# Altium PCB PCB.PcbDoc
Units mm, origin at the board's own origin, x right, y up, seen from the top; angles counter-clockwise.
Board outline 45 x 45 mm, 2 copper layers (Top Layer, Bottom Layer); 38 components, 27 nets, 182 pads, 49 vias.
Unrouted connection lines stored in the file: 8.
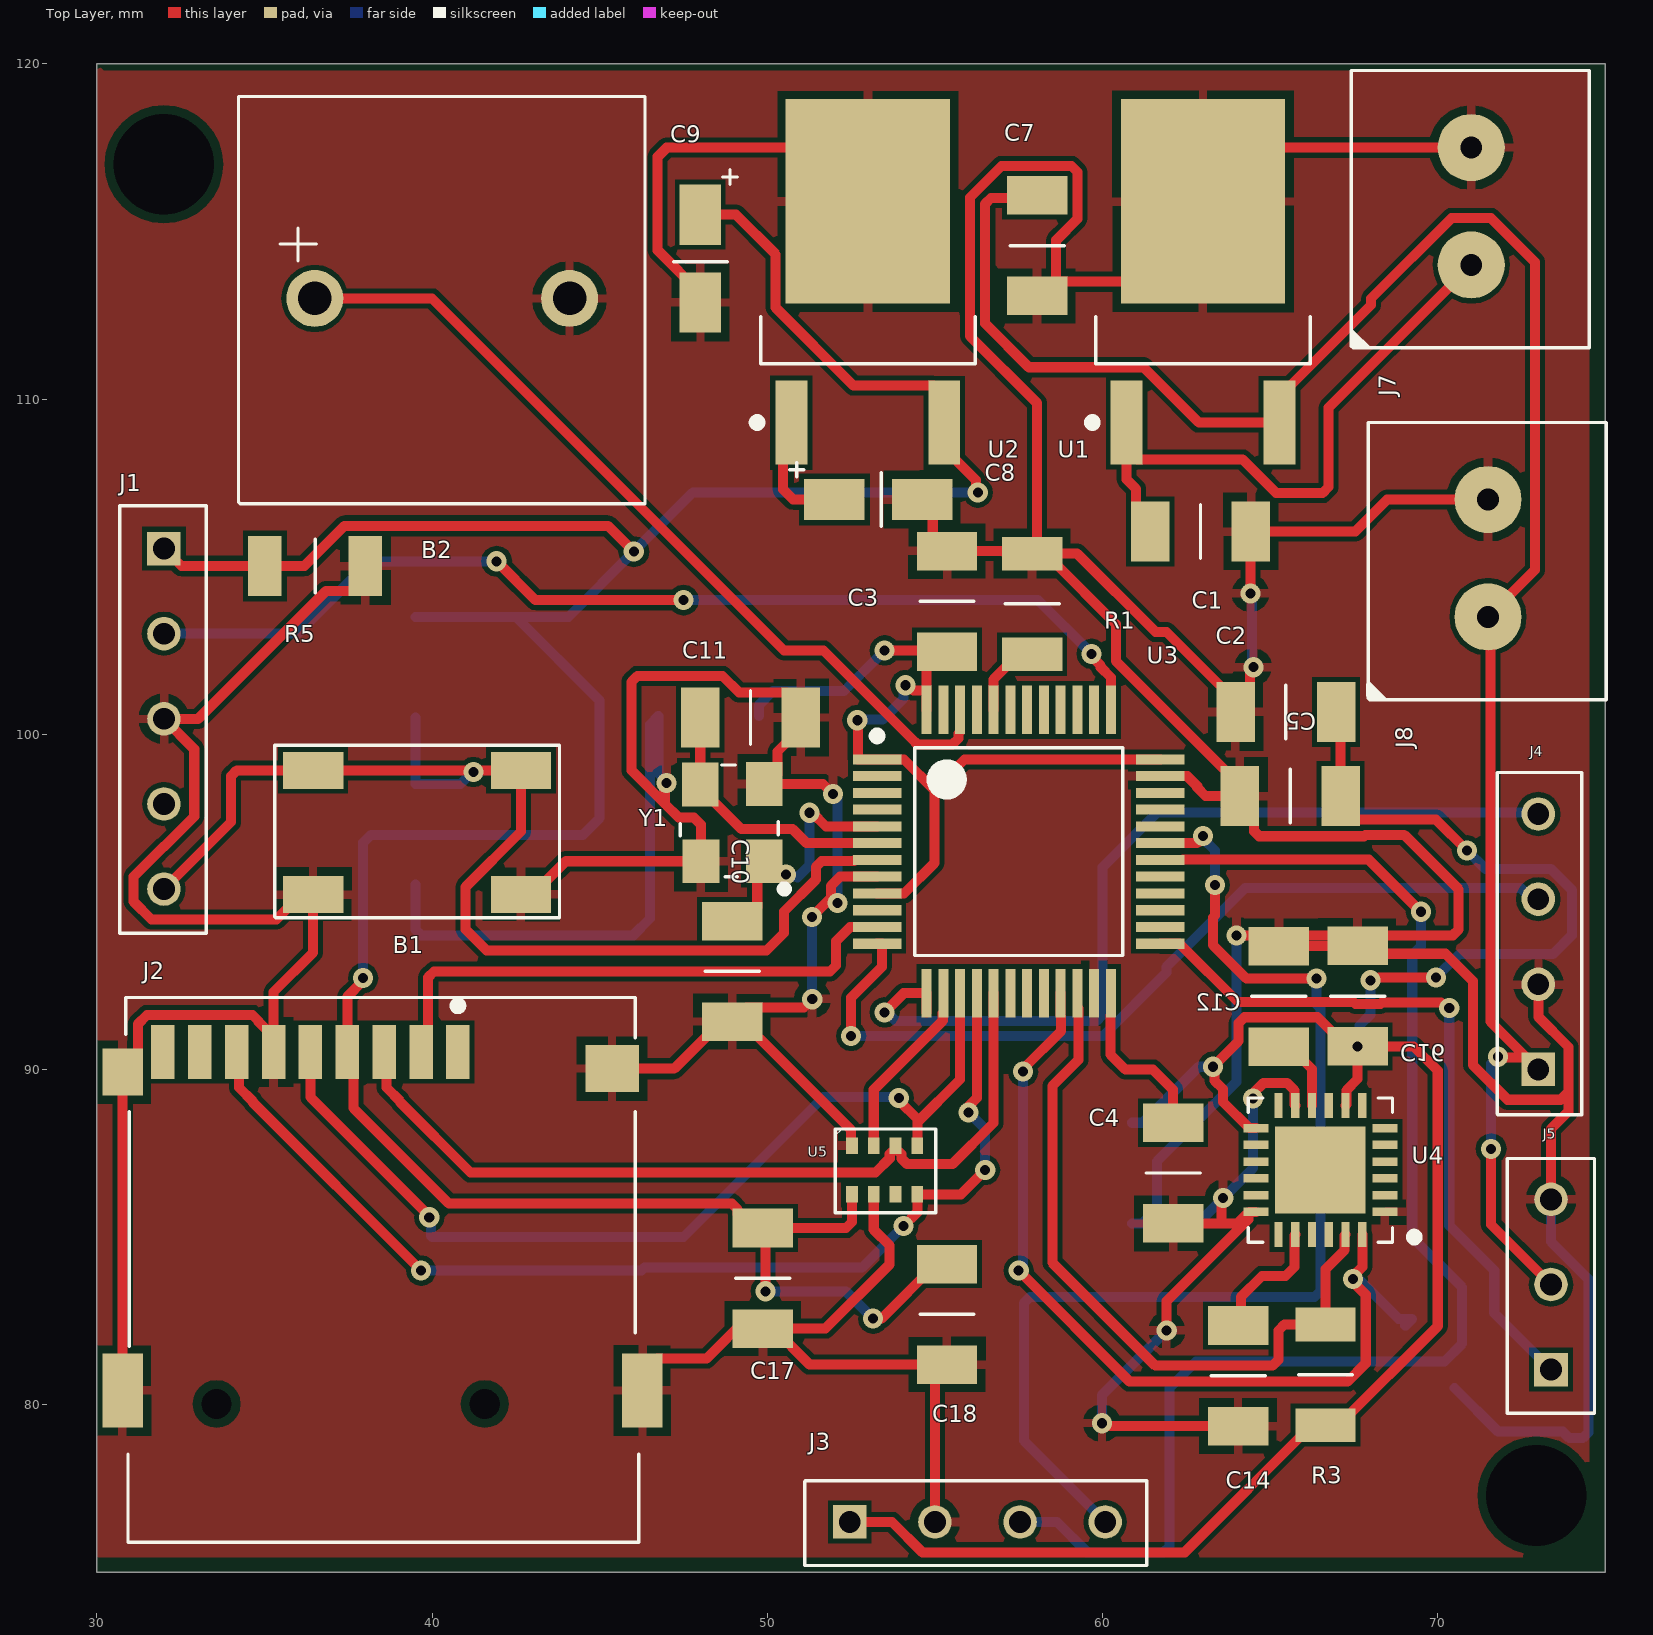
[diagram p0: Top Layer view]
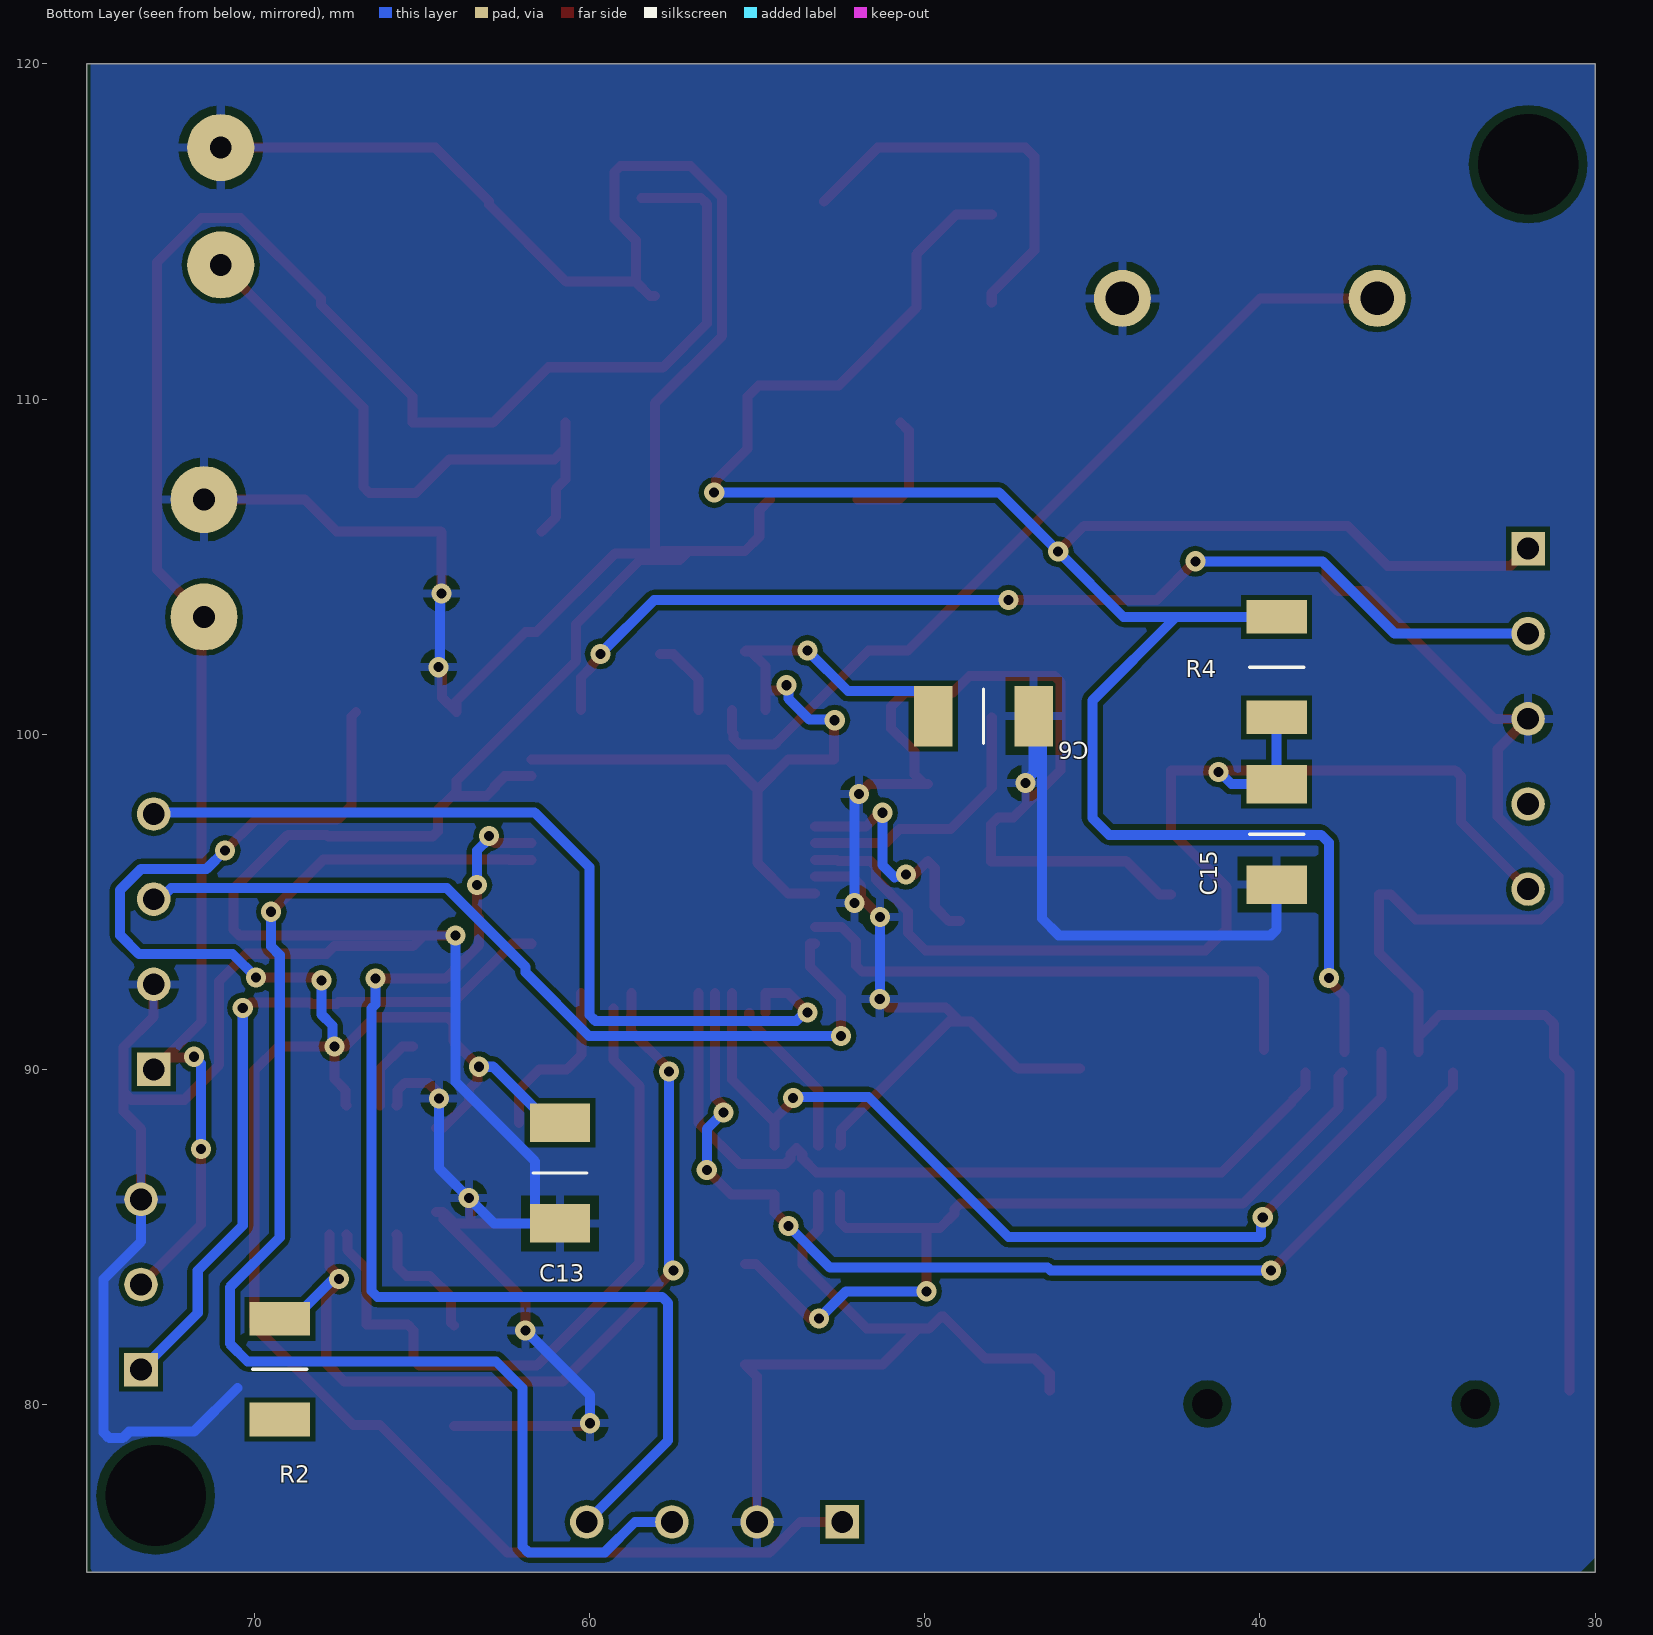
[diagram p1: Bottom Layer view, seen from below]
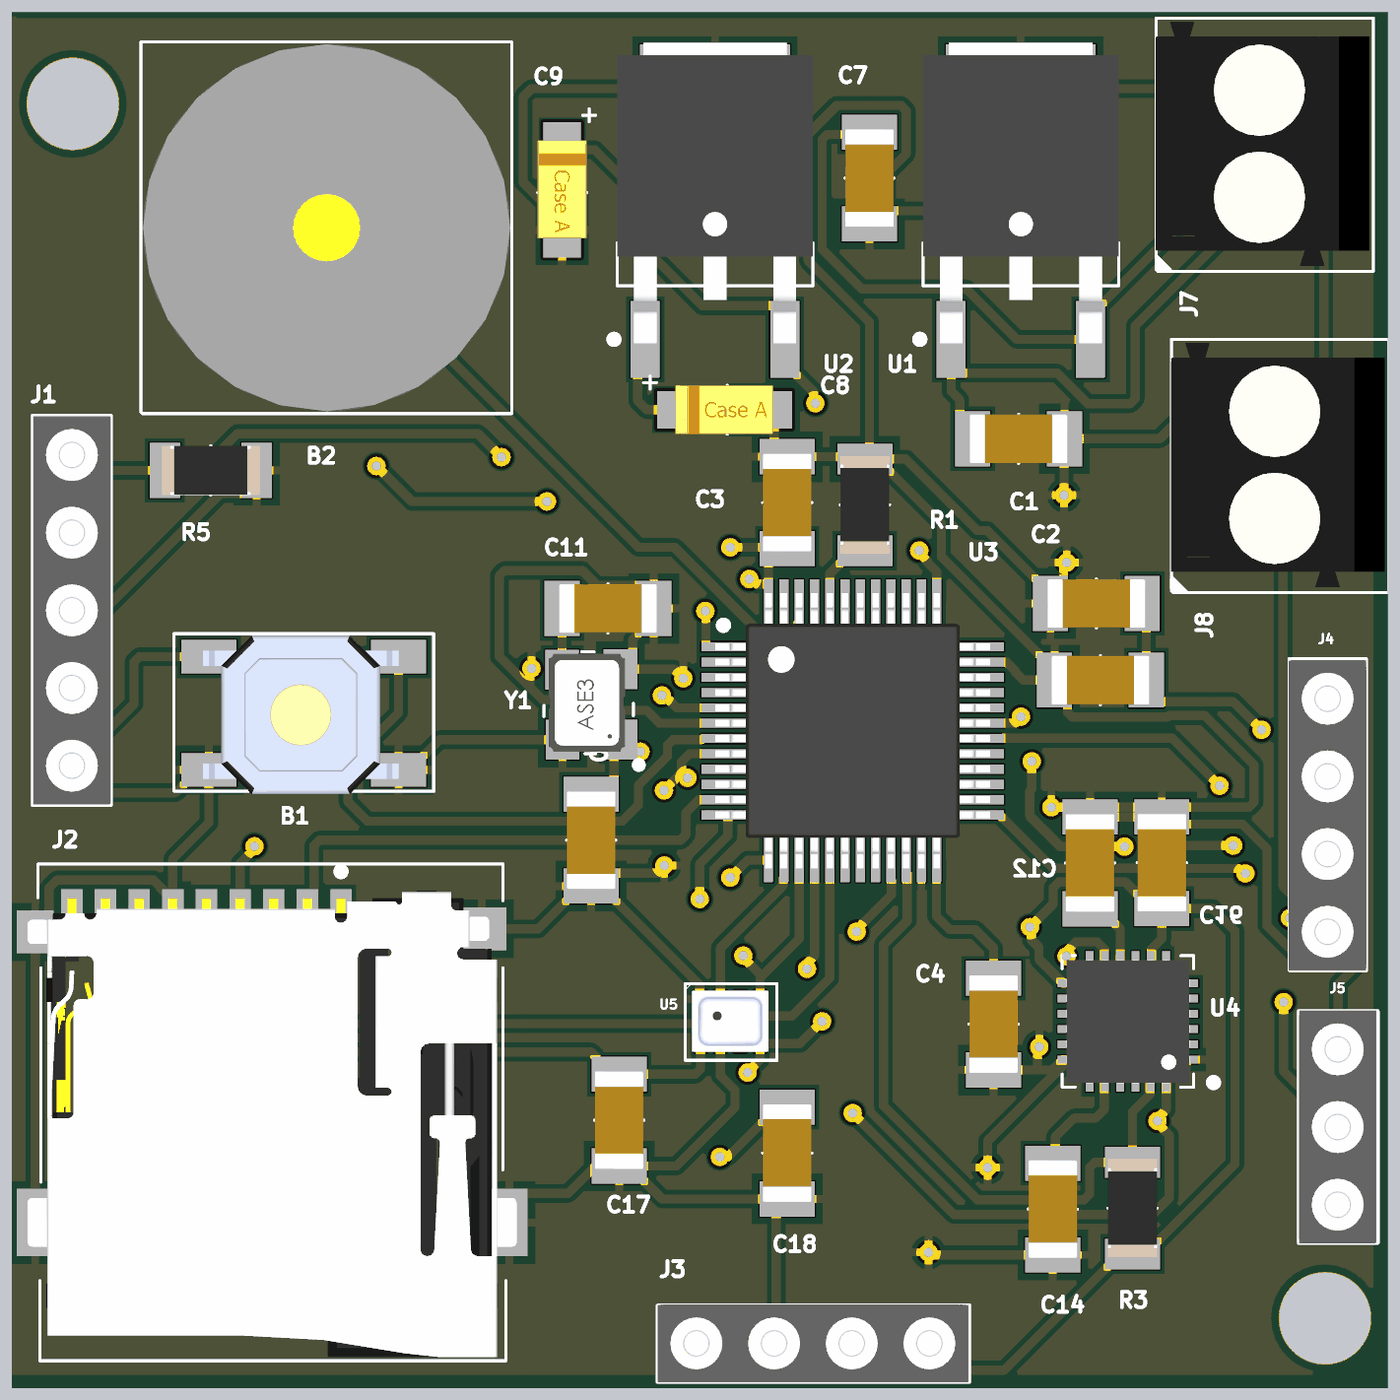
[diagram p2: 3D render of the assembled board from above, using the file's embedded part models]
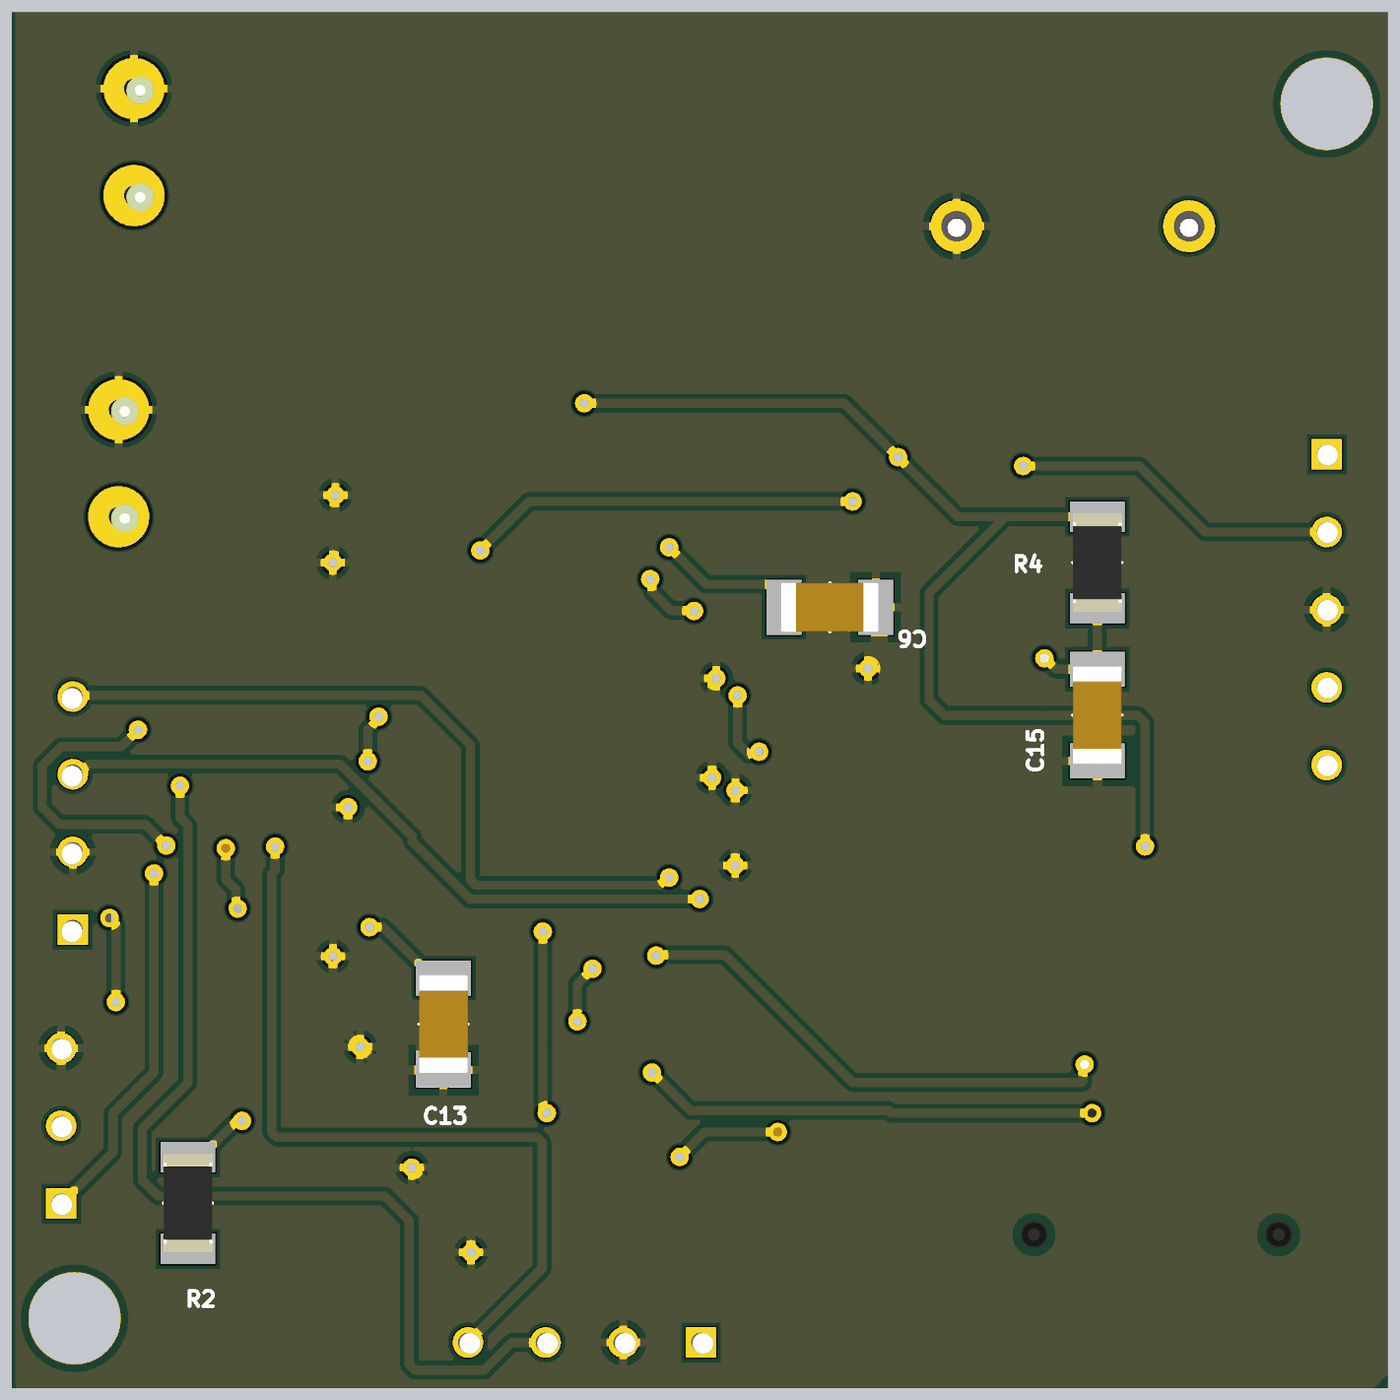
[diagram p3: 3D render of the assembled board from below, using the file's embedded part models]

## Layer stack, top to bottom
Top Solder: solder mask 0.0102, Solder Resist, Dk 3.5
Top Layer: signal copper 0.0356
Dielectric 1: dielectric 0.32, FR-4, Dk 4.8
Bottom Layer: signal copper 0.0356
Bottom Solder: solder mask 0.0102, Solder Resist, Dk 3.5

## Board outline
30,75 75,75 75,120 30,120

## Design rules (kind name [scope] priority, off if disabled: settings)
Clearance [All] p1: gap=0.254 ignorepadtopadclearanceinfootprint=FALSE except(0.152: Arc-Track Arc-SMDPad Arc-Poly Track-Track Track-SMDPad Track-Poly SMDPad-SMDPad SMDPad-Via SMDPad-Poly THPad-Poly Via-Poly Fill-Poly Poly-Poly)
PolygonConnect [All] p1: connectstyle=Relief reliefconductorwidth=0.254 reliefentries=4 polygonreliefangle="90 Angle" airgapwidth=0.254
RoutingVias [All] p1: holewidth=0.3 width=0.6 viastyle="Through Hole" minholewidth=0.2 minwidth=0.2 maxholewidth=0.9 maxwidth=1.27
SolderMaskExpansion [All] p1: expansion=0.102 istentingtop=FALSE
Width [All] p1: maxlimit=1 minlimit=0.254 preferedwidth=0.3 minimp=50.000000 maximp=50.000000 favimp=50.000000
30 further rules are at their usual default settings.

## Components (designator, comment, footprint, x,y, rotation, side; value= is the part's Value field where it differs from the comment)
B1 "Push Button" "PUSH BUTTON" 38.702,97.524 r0 top
B2 "BUZZER 5V" BUZZER 40.3,112.95 r0 top
C1 "330nF CAP-1206" CAP-1206 63,106 r0 top
C2 "0.1 uF CAP-1206" CAP-1206 65.394,100.714 r180 top
C3 "0.1 uF CAP-1206" CAP-1206 55.41,104.038 r90 top
C4 "0.1 uF CAP-1206" CAP-1206 62.056,86.836 r270 top
C5 "0.1 uF CAP-1206" CAP-1206 65.526,98.209 r180 top
C6 "0.1 uF CAP-1206" CAP-1206 48.172,100.491 r180 bottom
C7 "10 uF CAP-1206" CAP-1206 58,114.5 r270 top
C8 "10 uF - TANTAL" "CAP-1206 TANTAL" 53.4,107.3 r0 top
C9 "10 uF - TANTAL" "CAP-1206 TANTAL" 48.3,114.1 r270 top
C10 "16 pF CAP" "16pF CAP" 49,93 r90 top
C11 "16 pF CAP" "16pF CAP" 49.425,100.55 r180 top
C12 "0.1 uF CAP-1206" CAP-1206 67.66,92.262 r90 top
C13 "0.1 uF CAP-1206" CAP-1206 60.928,86.836 r270 bottom
C14 "2.2 nF c1206" CAP-1206 63.995,80.787 r270 top
C15 "0.1 uF CAP-1206" CAP-1206 39.45,97.09 r90 bottom
C16 "0.1 uF CAP-1206" CAP-1206 65.311,92.255 r90 top
C17 "0.1 uF CAP-1206" CAP-1206 49.815,83.695 r270 top
C18 "0.1 uF CAP-1206" CAP-1206 55.31,82.619 r270 top
J1 "HAEDER 2.54mm1*5" "FEMALE HEADER 1*5 2.54 MM" 32,105.54 r270 top
J2 "MİCRO SD KART" "MİCRO SD KART" 38.286,83.447 r0 top
J3 "HEADER 2.54mm 1*4" "FEMALE HEADER 1*4 2.54MM" 52.46,76.5 r0 top
J4 "HEADER 2.54mm 1*4" "FEMALE HEADER 1*4 2.54MM" 73,90 r90 top
J5 "HEADER 2.54mm 1*3" "FEMALE HEADER 1*3 2.54MM" 73.379,81.045 r90 top
J7 "KLEMENS" "KLEMENS 1*2 / 3.5mm" 71.4,115.8 r90 top
J8 "KLEMENS" "KLEMENS 1*2 / 3.5mm" 71.9,105.3 r90 top
R1 "10K R-1206" "RES 1206" 57.884,103.901 r90 top
R2 "4.7K R-1206" "RES 1206" 69.22,81.045 r270 bottom
R3 "4.7K R-1206" "RES 1206" 66.667,80.879 r270 top
R4 "10K R-1206" "RES 1206" 39.517,102.013 r90 bottom
R5 "10K R-1206" "RES 1206" 36.5,105 r180 top
U1 "L7805-DPAK" "DPAKL7805 REGULATOR" 63,113.5 r90 top
U2 "LD108633-DPAK" "DPAKL7805 REGULATOR" 53,113.5 r90 top
U3 "STM32101" FQP48 57.5,96.5 r0 top
U4 "MPU6050" MPU6050-QFN 66.5,87 r180 top
U5 "BMP280" BMP-280 53.5,87 r0 top
Y1 "8 Mhz 12.5pF Osc" "8 Mhz 12.5pF OSC" 49.017,97.597 r90 top

## Footprints (in the part's own frame and the unit in brackets; to place one, negate y for a bottom-side part, rotate by r counter-clockwise, add the part's x,y. Pads: shape width x height; smd on the part's side, far side on the other; paste and mask are expansions set on the pad)
"8 Mhz 12.5pF OSC" [mm]
  rect 1.3x1.1 smd mask+0.05: 1(-1.381,-0.89) 2(0.919,-0.89) 3(0.903,1.017) 4(-1.386,1.001)
  silkscreen extent -2.31,-1.59 1.48,1.61, body extent -1.78,-1.04 1.42,1.46, height 1.22
"16pF CAP" [mm]
  rect 1.15x1.8 smd mask+0.05: 1(-1.575,0.05) 2(1.425,0.05)
  silkscreen extent -0.07,-0.75 -0.07,0.86, body extent -1.67,-0.75 1.53,0.85, height 1
BMP-280 [mm]
  rect 0.35x0.5 smd: 1(-0.975,0.725) 2(-0.325,0.725) 3(0.325,0.725) 4(0.975,0.725) 5(0.975,-0.725) 6(0.325,-0.725) 7(-0.325,-0.725) 8(-0.975,-0.725)
  silkscreen extent -1.5,-1.28 1.53,1.25, body extent -1.5,-1 1.25,1.5, height 1.05
BUZZER [mm] "1*2"
  round 1.7 hole 1 mask+0.05: 1(-3.8,0.05) 2(3.8,0.05)
  silkscreen extent -6.08,-6.08 6.05,6.07, body extent -6,-6 6,6, height 9.5
CAP-1206 [mm]
  rect 1.15x1.8 smd mask+0.05: 1(-1.575,0.05) 2(1.425,0.05)
  silkscreen extent -0.07,-0.75 -0.07,0.86, body extent -1.67,-0.75 1.53,0.85, height 1
"CAP-1206 TANTAL" [mm]
  rect 1.8x1.23 smd: 1(-1.4,-0.3) 1(-1.4,-0.3) 2(1.22,-0.3)
  silkscreen extent -2.74,-1.1 0,0.8, body extent -1.7,-1.1 1.5,0.5, height 1.62
"DPAKL7805 REGULATOR" [mm]
  rect 2.5x0.95 smd mask+0.05: 1(-4.2,2.28) 2(-4.2,-2.28)
  rect 6.1x4.9 smd mask+0.05: 3(2.4,0)
  silkscreen extent -4.32,-3.2 -1.05,3.43, body extent -4.32,-3.2 5.5,3.2, height 3.3
"FEMALE HEADER 1*3 2.54MM" [mm]
  rect 1x1 hole 0.65 unplated mask+0.05: 1(0,0)
  round 1 hole 0.65 unplated mask+0.05: 2(2.54,0) 3(5.08,0)
  silkscreen extent -1.3,-1.3 6.3,1.3, body extent -1.31,-1.25 6.31,1.29, height 6.72
"FEMALE HEADER 1*4 2.54MM" [mm]
  rect 1x1 hole 0.65 unplated mask+0.05: 1(0,0)
  round 1 hole 0.65 unplated mask+0.05: 2(2.54,0) 3(5.08,0) 4(7.62,0)
  silkscreen extent -1.35,-1.3 8.86,1.23, body extent -1.34,-1.3 8.82,1.24, height 6.72
"FEMALE HEADER 1*5 2.54 MM" [mm]
  rect 1x1 hole 0.65 unplated mask+0.05: 1(0,0)
  round 1 hole 0.65 unplated mask+0.05: 2(2.54,0) 3(5.08,0) 4(7.62,0) 5(10.16,0)
  silkscreen extent -1.28,-1.32 11.47,1.26, body extent -1.25,-1.3 11.45,1.24, height 6.72
FQP48 [mm]
  rect 1.45x0.3 smd mask+0.05: 1(-4.225,2.75) 2(-4.225,2.25) 3(-4.225,1.75) 4(-4.225,1.25) 5(-4.225,0.75) 6(-4.225,0.25) 7(-4.225,-0.25) 8(-4.225,-0.75) 9(-4.225,-1.25) 10(-4.225,-1.75) 11(-4.225,-2.25) 12(-4.225,-2.75) 25(4.225,-2.75) 26(4.225,-2.25) 27(4.225,-1.75) 28(4.225,-1.25) 29(4.225,-0.75) 30(4.225,-0.25) 31(4.225,0.25) 32(4.225,0.75) 33(4.225,1.25) 34(4.225,1.75) 35(4.225,2.25) 36(4.225,2.75)
  rect 0.3x1.45 smd mask+0.05: 13(-2.75,-4.225) 14(-2.25,-4.225) 15(-1.75,-4.225) 16(-1.25,-4.225) 17(-0.75,-4.225) 18(-0.25,-4.225) 19(0.25,-4.225) 20(0.75,-4.225) 21(1.25,-4.225) 22(1.75,-4.225) 23(2.25,-4.225) 24(2.75,-4.225) 37(2.75,4.225) 38(2.25,4.225) 39(1.75,4.225) 40(1.25,4.225) 41(0.75,4.225) 42(0.25,4.225) 43(-0.25,4.225) 44(-0.75,4.225) 45(-1.25,4.225) 46(-1.75,4.225) 47(-2.25,4.225) 48(-2.75,4.225)
  silkscreen extent -4.35,-3.1 3.1,3.57, body extent -4.5,-4.5 4.5,4.5, height 1.6
"KLEMENS 1*2 / 3.5mm" [mm]
  round 2 hole 0.65: 1(-1.8,0.4) 2(1.7,0.4)
  silkscreen extent -4.31,-3.13 4,4.03, body extent -4.1,-3 3.89,4, height 8.9
"MİCRO SD KART" [mm] "SD CARD HOLDER"
  rect 0.7x1.6 smd paste+0 mask+0: 1(2.484,7.075) 2(1.384,7.075) 3(0.284,7.075) 4(-0.816,7.075) 5(-1.916,7.075) 6(-3.016,7.075) 7(-4.116,7.075) 8(-5.216,7.075) Cd(-6.316,7.075)
  rect 1.2x1.4 smd paste+0 mask+0: 10(-7.516,6.475)
  rect 1.6x1.4 smd paste+0 mask+0: 11(7.084,6.575)
  rect 1.2x2.2 smd paste+0 mask+0: 12(-7.516,-3.025) 13(7.984,-3.025)
  round 0 hole 0.9 unplated paste-1000 mask+0: ""(-4.716,-3.425) ""(3.284,-3.425)
  silkscreen extent -7.42,-7.55 7.88,8.7, body extent -7.77,-7.42 8.23,7.83, height 1.85
MPU6050-QFN [mm] "QFN, 24-Leads, Body 3,95x3,95mm, Pitch 0,50mm, Thermal Pad 2,70x2,60mm, IPC Medium Density"
  rect 0.75x0.25 smd mask+0.05: 1(-1.925,1.25) 2(-1.925,0.75) 3(-1.925,0.25) 4(-1.925,-0.25) 5(-1.925,-0.75) 6(-1.925,-1.25) 13(1.925,-1.25) 14(1.925,-0.75) 15(1.925,-0.25) 16(1.925,0.25) 17(1.925,0.75) 18(1.925,1.25)
  rect 0.25x0.75 smd mask+0.05: 7(-1.25,-1.925) 8(-0.75,-1.925) 9(-0.25,-1.925) 10(0.25,-1.925) 11(0.75,-1.925) 12(1.25,-1.925) 19(1.25,1.925) 20(0.75,1.925) 21(0.25,1.925) 22(-0.25,1.925) 23(-0.75,1.925) 24(-1.25,1.925)
  rect 2.7x2.6 smd: 25(0,0)
  silkscreen extent -2.93,-2.15 2.15,2.15, body extent -2.02,-2.02 2.02,2.02, height 0.95
"PUSH BUTTON" [mm] "HAZIR"
  rect 1.8x1.1 smd mask+0.05: 1(-2.25,1.4) 2(3.95,1.4) 3(-2.25,-2.3) 4(3.95,-2.3)
  silkscreen extent -3.4,-3 5.1,2.15, body extent -2.45,-3.1 3.95,2.1, height 1.5
"RES 1206" [mm]
  rect 1x1.8 smd mask+0.05: 1(-1.513,-0.017) 2(1.487,-0.017)
  silkscreen extent -0.01,-0.82 -0.01,0.79, body extent -1.61,-0.82 1.59,0.79, height 0.55

## Part data
B1: "Smd Push Button", Satın Alma Linki=https://urun.n11.com/diger/mini-pushbutton-switch-smd-P227461537?gclid=Cj0KCQjwkoDmBRCcARIsAG3xzl8Y_-jeD7HocNM6lvuZ_rVp83568XPGtNzlPwXWLph8oCRqo0yh87UaApZYEALw_wcB&gclsrc=aw.ds
B2: "1*2"
C1: "330nF 1206"
C2 C3 C4 C5 C6 C12 C13 C15 C16 C17 C18: "0.1 uF 1206"
C8 C9: "KUTUPLU"
C10 C11: "16pF Capasitör"
J1: "5 PİNLİ"
J2: "SD HOLDER"
J3 J4: "4 PİNLİ"
J5: "3 PİNLİ"
J7 J8: "1*2/ 3.5MM"
U1: "5V REGÜLATÖR DPAK"
U2: "3.3V  REGÜLATÖR"
U3: "STM32F48 101 İŞLEMCİ", ComponentLink1Description="New link", ComponentLink2Description="New link", ComponentLink3Description="New link"
U4: "QFNP 6*6 İŞLEMCİ"
U5: "BMP280 SENSOR"

## Free pads (board coordinates)
  round 1 hole 3: 11(32,117) 11(72.944,77.29)

## Via types
v1: diameter 0.6, hole 0.3, Top Layer to Bottom Layer, 49 vias

## Nets (pads, with @x,y where several pads share a name; then routed paths per layer and width w, separated by ;. In a path a pad name is that pad's centre, name@x,y a point inside that pad or via, vN(x,y) a via of type N, cw(c..) or ccw(c..) an arc to the next point about the centre after c; other vN are vias at no path point)
"3.3 V": C2.1 C3.1 C4.1 C5.1 C6.1 C12.1 C13.1 J3.1 R2.2 R3.2 U3.1 U3.9 U3.24 U3.36 U3.48 U4.8 U4.13 | length 96.8
  Top Layer w0.3: J3.1 53.722,76.5 54.626,75.596 62.455,75.596 66.251,79.392 R3.2 67.051,79.392 70,82.341 70,89.966 69.279,90.687 v1(67.61,90.687) ; v1(52.684,100.418) 52.7,100.402 52.7,99.25 U3.1 54.077,99.25 54.981,98.346 ; U3.9 54.077,95.25 54.981,96.154 54.981,98.346 ; v1(53.5,102.5) 55.324,102.5 C3.1 55.175,102.463 54.75,102.038 U3.48@54.75,101.3 ; v1(54.12,101.462) 54.201,101.462 54.363,101.3 U3.48@54.75,101.3 ; U3.48 U3.48@54.75,101.3 ; U3.24 60.25,91.612 60.242,91.604 60.242,90.44 60.681,90 61.5,90 62.106,89.394 C4.1 ; U3.36 55.885,99.25 54.981,98.346 ; U4.13 64.375,88.25 63.593,89.032 63.593,89.417 63.344,89.666 63.344,90.033 v1(63.296,90.081) 64.059,90.844 64.059,91.38 64.236,91.557 66.415,91.557 67.285,90.687 v1(67.61,90.687) ; C2.1 67.101,100.532 C5.1 67.101,97.877 67.526,97.452 69.952,97.452 v1(70.87,96.534) ; U4.8 67.275,88.95 67.275,89.377 67.61,89.712 v1(67.61,90.687) ; v1(68,92.66) 68.057,92.718 68.218,92.718 68.247,92.747 v1(69.943,92.747)
  Bottom Layer w0.3: C6.1 49.747,100.866 50.172,101.291 52.291,101.291 v1(53.5,102.5) ; v1(52.684,100.418) 52.7,100.434 53.434,100.434 54.062,101.062 54.062,101.405 v1(54.12,101.462) ; C13.1 61.203,88.411 62.874,90.081 v1(63.296,90.081) ; v1(67.61,90.687) 67.668,90.745 67.668,91.313 68,91.645 v1(68,92.66) ; v1(69.943,92.747) 69.952,92.747 70.649,93.444 73.444,93.444 74,94 74,95.358 73.374,95.984 71.42,95.984 v1(70.87,96.534)
3.3V: C9.1 C17.1 C18.1 J1.1 J2.4 R4.2 R5.2 U2.2 U5.6 U5.8 | length 94.7
  Top Layer w0.3: J1.1 32.523,105.017 R5.2 36.185,105.017 37.387,106.219 45.247,106.219 v1(46.016,105.449) ; J2.4 37.47,92.172 37.941,92.643 v1(37.941,92.724) ; J2.4@37.536,89.913 37.655,89.794 37.655,88.845 40.5,86 48.939,86 49.115,85.824 49.115,85.695 49.54,85.27 C17.1 ; C9.1@48,115.5 49.065,115.5 50.248,114.317 50.248,112.725 52.573,110.4 54.955,110.4 55.28,110.075 U2.2 55.28,108.525 56.221,107.584 56.221,107.268 v1(56.279,107.21) ; v1(49.947,83.382) 49.947,85.188 C17.1 ; U5.8 52.525,85.446 52.349,85.27 C17.1 ; v1(53.157,82.566) 53.408,82.566 55.035,84.194 C18.1
  Bottom Layer w0.3: v1(37.941,92.724) 37.941,96.765 38.176,97 44.5,97 45,97.5 45,101 42.5,103.5 ; R4.2 42.5,103.5 ; v1(49.947,83.382) 52.341,83.382 v1(53.157,82.566) ; v1(56.279,107.21) 47.778,107.21 v1(46.016,105.449) 44.067,103.5 42.5,103.5
5V: C7.1 J4.1 J5.2 J8.1 U1.2 | length 60.6
  Top Layer w0.3: C7.1@58.45,116 56.676,116 56.5,115.824 56.5,112.25 57.801,110.949 61.223,110.949 62.872,109.3 U1.2 65.28,110.075 68.012,112.807 68.012,112.997 70.418,115.404 71.582,115.404 72.904,114.082 72.904,104.904 J8.1 71.574,103.426 71.574,91.426 J4.1@72.65,90.35 ; v1(71.592,87.631) 71.592,85.371 J5.2 ; v1(71.8,90.379) 71.829,90.35 J4.1@72.65,90.35 ; J4.1 J4.1@72.65,90.35
  Bottom Layer w0.3: v1(71.592,87.631) 71.592,90.172 v1(71.8,90.379)
"7.4 V": C1.1 J7.1 U1.1 | length 18.6
  Top Layer w0.3: U1.1 U1.1@60.72,108.525 ; C1.1 61,106.475 61,107.32 60.72,107.6 U1.1@60.72,108.525 ; J7.1 66.743,109.743 66.743,107.373 66.567,107.197 65.18,107.197 64.177,108.2 61.045,108.2 U1.1@60.72,108.525
7.4V: C8.1 U2.1 | length 3.8
  Top Layer w0.3: U2.1 50.474,109.054 50.474,107.299 50.773,107 C8.1@52,107
GND: B1.3 B1.4 B2.2 C1.2 C2.2 C3.2 C4.2 C5.2 C6.2 C7.2 C8.2 C9.2 C10.1 C11.1 C12.2 C13.2 C14.2 C15.1 C16.2 C17.2 C18.2 J1.3 J2.6 J2.10 J2.11 J2.12 J2.13 J3.2 J4.2 J5.3 J7.2 J8.2 R1.2 R5.1 U1.3 U2.3 U3.8 U3.23 U3.35 U3.47 U4.1 U4.9 U4.11 U4.18 U5.1 U5.7 Y1.2 Y1.4 | length 290.6
  Top Layer w0.3: J2.12 J2.10 31.22,90.373 31.22,91.35 31.495,91.625 34.645,91.625 34.822,91.448 34.822,91.421 J2.6@35.27,90.973 ; J2.6 J2.6@35.27,90.973 ; R5.1 38.013,104.617 37.663,104.267 36.829,104.267 33.023,100.46 J1.3 32.904,99.556 32.904,97.546 32.008,96.65 31.992,96.65 31.096,95.754 31.096,95.006 31.626,94.476 35.354,94.476 36.102,95.224 B1.3 36.452,93.489 35.27,92.307 J2.6@35.27,90.973 ; B1.4 43.002,95.224 43.989,96.211 Y1.4 48.016,97.311 47.809,97.518 47.355,97.518 46.936,97.936 ; J2.11 47.223,90.023 48.625,91.425 C10.1 ; J2.13 46.27,80.923 46.72,81.373 48.184,81.373 49.441,82.629 49.506,82.629 C17.2 C17.2@50.19,82.27 ; v1(46.998,98.541) 46.941,98.483 46.941,97.941 46.936,97.936 ; C9.2 48,113.165 46.728,114.437 46.728,117.228 47,117.5 51.4,117.5 U2.3 ; Y1.2 Y1.2@50.015,98.515 ; v1(51.332,94.552) 51.899,95.119 51.899,95.478 52.172,95.75 U3.8 ; v1(51.34,92.095) 51.095,91.85 49.375,91.85 C10.1 ; v1(51.96,98.217) 51.661,98.515 Y1.2@50.015,98.515 ; U5.1 52.5,87.75 52.5,88.2 49.275,91.425 C10.1 ; U5.7 53.175,85.221 53.65,84.746 53.65,84.188 51.732,82.27 C17.2@50.19,82.27 ; C8.2 54.935,106.685 54.935,105.888 C3.2 R1.2@57.042,105.463 ; J3.2 55,80.834 C18.2 51.266,81.194 C17.2@50.19,82.27 ; C7.2 58.192,113.075 C7.2@58.617,113.5 ; v1(59.98,79.446) 60.064,79.362 C14.2 ; U3.35 62.527,98.75 62.825,98.452 62.825,98.409 63.076,98.159 63.969,98.159 C5.2 ; v1(61.915,82.216) 61.915,83.09 64.35,85.525 U4.18@64.35,85.725 ; C4.2 63.5,85.411 ; v1(63.601,86.162) 63.543,86.105 63.543,85.454 63.5,85.411 ; v1(64,94) C16.2@64.941,94 ; v1(64.412,104.204) 64.412,106.037 C1.2 67.541,106.05 68.491,107 J8.2 ; v1(64.492,89.129) 64.492,89.286 64.808,89.602 65.5,89.602 65.725,89.377 65.725,88.95 U4.11 ; v1(64.5,102) 64.5,101.919 64.394,101.813 64.394,101.089 C2.2 63.969,100.989 61.91,103.048 61.585,103.048 59.244,105.388 58.05,105.388 R1.2 ; U4.18 64.375,85.75 U4.18@64.35,85.725 ; J7.2 64.6,117.5 U1.3 63,115.8 60.7,113.5 C7.2@58.617,113.5 ; J4.2 73,91.571 73.904,90.667 73.904,89.333 ; J5.3 73.379,88.228 73.904,88.753 73.904,89.333 ; 46.936,97.936 45.947,98.926 45.947,101.565 46.123,101.741 48.662,101.741 49.152,101.25 50.575,101.25 51,100.825 C11.1 51,100.175 50.307,99.482 50.307,98.807 Y1.2@50.015,98.515 ; R1.2@57.042,105.463 57.309,105.197 58.492,105.197 60.398,103.291 60.398,102.186 63.969,98.615 63.969,98.29 C5.2 ; R1.2@57.042,105.463 57.826,105.463 R1.2 ; R1.2 58.05,105.538 58.05,109.874 56.048,111.876 56.048,116.011 56.989,116.952 59.075,116.952 59.252,116.775 59.252,115.375 58.617,114.739 C7.2@58.617,113.5 ; 63.5,85.411 64.036,85.411 U4.18@64.35,85.725 ; C5.2 64.526,97.734 64.526,97.107 64.676,96.957 67.801,96.957 67.844,97 69,97 70.626,95.374 70.626,94.176 70.45,94 67.61,94 C16.2@64.941,94 ; C16.2@64.941,94 C16.2 67.603,93.68 C12.2 67.846,93.451 70.235,93.451 71.048,92.638 71.048,90.135 72.087,89.096 73.667,89.096 73.904,89.333
  Bottom Layer w0.3: C15.1 39.5,94.176 39.676,94 46,94 46.5,94.5 46.5,100.294 C6.2 46.747,98.842 46.998,98.591 v1(46.998,98.541) ; v1(51.332,94.552) 51.336,94.547 51.336,92.1 v1(51.34,92.095) ; v1(51.96,98.217) 52.098,98.079 v1(52.098,94.964) ; v1(59.98,79.446) 59.98,80.281 v1(61.915,82.216) ; C13.2 C13.2@61.203,85.411 ; v1(64,94) 64,89.63 61.628,87.259 61.628,85.836 C13.2@61.203,85.411 ; v1(64.412,104.204) 64.456,104.16 64.456,102.044 v1(64.5,102) ; v1(64.492,89.129) 64.492,87.054 v1(63.601,86.162) 62.849,85.411 C13.2@61.203,85.411 ; 70.5,80.5 71.806,79.194 73.733,79.194 73.927,79 74.324,79 74.5,79.176 74.5,83.742 73.379,84.863 J5.3
NetB2_1: B2.1 U3.46 | length 25.7
  Top Layer w0.3: B2.1 40,113 50.5,102.5 51.673,102.5 54.298,99.875 54.475,99.698 55.525,99.698 55.702,99.875 55.702,100.014 55.75,100.062 U3.46
NetC10_2: C10.2 U3.5 Y1.1 | length 7.8
  Top Layer w0.3: C10.2 49.275,94.425 49.7,94.85 49.7,96.008 Y1.1 50.306,95.817 v1(50.56,95.817) ; v1(51.263,97.658) 51.344,97.658 51.752,97.25 U3.5
  Bottom Layer w0.3: v1(50.56,95.817) 50.617,95.759 50.866,95.759 50.896,95.729 51.263,96.096 v1(51.263,97.658)
NetC11_2: C11.2 U3.6 Y1.3 | length 8.1
  Top Layer w0.3: C11.2 Y1.3 48,98.4 49.233,97.167 50.758,97.167 51.175,96.75 U3.6
NetC14_1: C14.1 U4.20 | length 3.8
  Top Layer w0.3: C14.1 64.125,82.442 64.125,83.211 64.755,83.841 65.456,83.841 65.725,84.11 65.725,85.05 U4.20
NetC16_1: C16.1 U4.10 | length 2.4
  Top Layer w0.3: C16.1 65.586,90.68 66.25,90.016 U4.10
NetJ1_2: J1.2 U3.37 | length 31.6
  Top Layer w0.3: v1(41.926,105.159) 43.086,104 v1(47.5,104) ; v1(59.677,102.399) 59.677,102.318 59.946,102.048 59.946,101.999 60.25,101.695 U3.37
  Bottom Layer w0.3: J1.2 35.978,103 38.138,105.159 v1(41.926,105.159) ; v1(47.5,104) 58.076,104 v1(59.677,102.399)
NetJ1_4: J1.4 U3.34
NetJ2_2: J2.2 U3.11 | length 16.6
  Top Layer w0.3: J2.2@39.884,90.575 39.884,92.749 40.06,92.925 51.872,92.925 52.047,93.101 52.047,93.825 52.473,94.25 U3.11
NetJ2_3: J2.3 U3.17 U5.3 | length 24.7
  Top Layer w0.3: J2.3@38.636,89.913 38.636,89.463 39.049,89.05 39.049,89.023 41.146,86.926 53.228,86.926 53.652,87.35 53.652,87.477 53.825,87.65 53.998,87.477 53.998,87.35 54.175,87.173 55.521,87.173 56.75,88.402 U3.17
NetJ2_5: J2.5 U3.15 U5.4 | length 28.7
  Top Layer w0.3: J2.5 36.37,89.174 39.914,85.629 v1(39.914,85.59) ; v1(53.923,89.15) 53.923,89.077 54.525,88.475 ; U5.4 54.475,88.425 55.75,89.7 U3.15
  Bottom Layer w0.3: v1(39.914,85.59) 39.972,85.533 39.972,85.028 40,85 47.5,85 51.675,89.175 53.897,89.175 v1(53.923,89.15)
NetJ2_7: J2.7 U3.16 U5.5 | length 32.1
  Top Layer w0.3: J2.7@34.236,89.913 34.236,89.463 34.649,89.05 34.649,89.023 v1(39.672,84) ; v1(54.064,85.327) 54.475,85.738 U5.5 55.775,86.275 v1(56.5,87) ; v1(56.006,88.718) 56.006,88.901 56.25,89.145 U3.16
  Bottom Layer w0.3: v1(39.672,84) 46.245,84 46.331,84.086 52.823,84.086 v1(54.064,85.327) ; v1(56.006,88.718) 56.5,88.224 v1(56.5,87)
NetJ3_3: J3.3 U3.30 | length 40.9
  Top Layer w0.3: U3.30 62.388,96.25 62.395,96.258 67.943,96.258 v1(69.497,94.704)
  Bottom Layer w0.3: J3.3 58.64,76.5 59.544,75.596 61.824,75.596 62,75.772 62,80.5 62.791,81.291 70.2,81.291 70.728,81.818 70.728,83.499 69.239,84.988 69.239,93.41 69.497,93.668 v1(69.497,94.704)
NetJ3_4: J3.4 U3.31 | length 34.2
  Top Layer w0.3: U3.31 62.824,96.75 63.002,96.928 v1(63.002,96.962) ; v1(63.354,95.503) 63.354,94.594 63.296,94.536 63.296,93.708 64.291,92.713 v1(66.386,92.713)
  Bottom Layer w0.3: J3.4 57.656,78.924 57.656,83.037 57.831,83.212 66.324,83.212 66.5,83.388 66.5,91.824 66.386,91.939 v1(66.386,92.713) ; v1(63.002,96.962) 63.002,96.884 63.354,96.532 v1(63.354,95.503)
NetJ4_3: J4.3 U3.12 | length 25.8
  Top Layer w0.3: v1(52.5,91) 52.5,92.141 53.42,93.061 53.42,93.75 U3.12
  Bottom Layer w0.3: v1(52.5,91) 60.011,91 61.904,92.892 61.904,93.057 64.258,95.411 72.479,95.411 72.811,95.08 J4.3
NetJ4_4: J4.4 U3.13 | length 26.9
  Top Layer w0.3: v1@53.557,91.647 v1(53.5,91.704) 54.071,92.275 U3.13 U3.13@54.75,91.7
  Bottom Layer w0.3: v1(53.5,91.704) 53.574,91.704 53.826,91.452 59.824,91.452 60,91.628 60,96.031 61.634,97.666 72.954,97.666 J4.4
NetJ5_1: J5.1 U3.25 | length 21.5
  Top Layer w0.3: U3.25 62.3,93.75 64.041,92.009 67.491,92.009 67.544,91.956 68.292,91.956 68.335,92 70.099,92 70.263,91.836 v1(70.344,91.836)
  Bottom Layer w0.3: v1(70.344,91.836) 70.344,85.341 71.687,83.999 71.687,82.737 J5.1
NetR1_1: R1.1 U3.44 | length 2.4
  Top Layer w0.3: U3.44 56.75,101.638 57.501,102.388 R1.1
NetR2_1: R2.1 U3.21 U4.24 | length 27.4
  Top Layer w0.3: v1(57.5,84) 60.813,80.687 67.307,80.687 67.853,81.233 67.853,83.28 67.467,83.665 v1(67.467,83.746) 67.467,83.827 67.75,84.11 U4.24 ; v1(57.631,89.935) 57.631,90.013 58.767,91.149 58.767,91.595 58.75,91.612 U3.21
  Bottom Layer w0.3: v1(57.5,84) 57.631,84.131 v1(57.631,89.935) ; v1(67.467,83.746) 67.525,83.689 67.705,83.689 68.837,82.557 R2.1 69.048,82.369 R2.1@69.025,82.369
NetR3_1: R3.1 U3.22 U4.23 | length 21.3
  Top Layer w0.3: U3.22@59.284,91.821 59.284,90.289 58.503,89.508 58.503,84.237 61.577,81.163 65.072,81.163 65.247,81.339 65.247,82.216 65.423,82.392 R3.1 66.651,84.039 67.225,84.614 67.225,85.05 U4.23
NetU3_14: U3.14 U5.2 | length 4.8
  Top Layer w0.3: U5.2 53.175,89.398 55.233,91.456 U3.14@55.233,91.688
NRST: B1.1 B1.2 C15.2 J1.5 R4.1 U3.7 | length 36.5
  Top Layer w0.3: J1.5 34,97.38 34,98.748 34.176,98.924 B1.1 41.232,98.924 B1.2 42.652,97.101 41,95.449 41,94.176 41.628,93.548 49.975,93.548 50.495,94.068 50.495,94.711 51.447,95.663 51.447,96.04 51.623,96.216 52.578,96.216 52.612,96.25 U3.7
  Bottom Layer w0.3: R4.1 C15.2 40.85,98.515 41.208,98.872 v1(41.232,98.872)
pads on no net: J2. J2.1 J2.8 J2.Cd U3.2 U3.3 U3.4 U3.10 U3.18 U3.19 U3.20 U3.26 U3.27 U3.28 U3.29 U3.32 U3.33 U3.38 U3.39 U3.40 U3.41 U3.42 U3.43 U3.45 U4.2 U4.3 U4.4 U4.5 U4.6 U4.7 U4.12 U4.14 U4.15 U4.16 U4.17 U4.19 U4.21 U4.22 U4.25

## Polygon pours and split planes (outlines as drawn)
GND on Bottom Layer "GND_L02_P000" (solid, pour order 0): 30,120 74.881,120 74.881,75.119 75,75 30.447,75 30,75.447
GND on Top Layer "GND_L01_P001" (solid, pour order 1): 30,120 30.2,119.8 74.525,119.8 74.525,75.475 74.553,75.447 30,75.447

## Silkscreen, mask and mechanical layers (free items; w line width, h text height)
Mechanical 1:
  the board outline again, w0.1